# EAGLE board IV_Swinger_2_module (EAGLE 9.1.3)
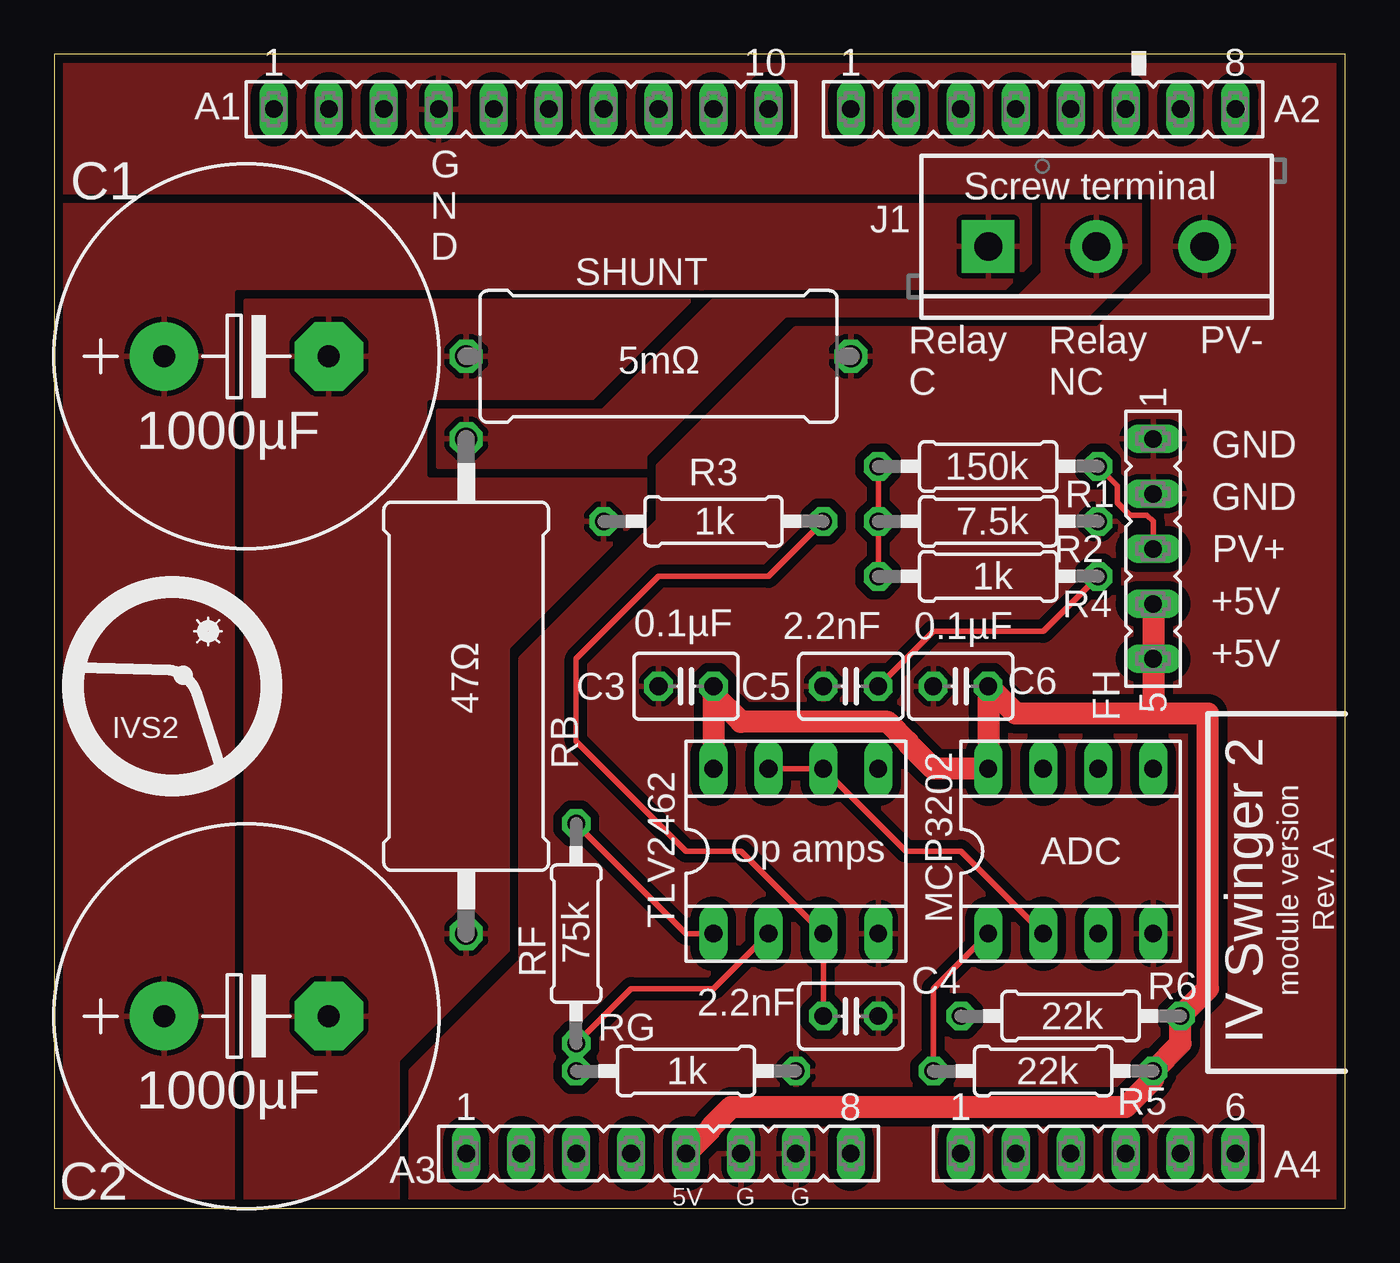
[diagram p0: board, top side]
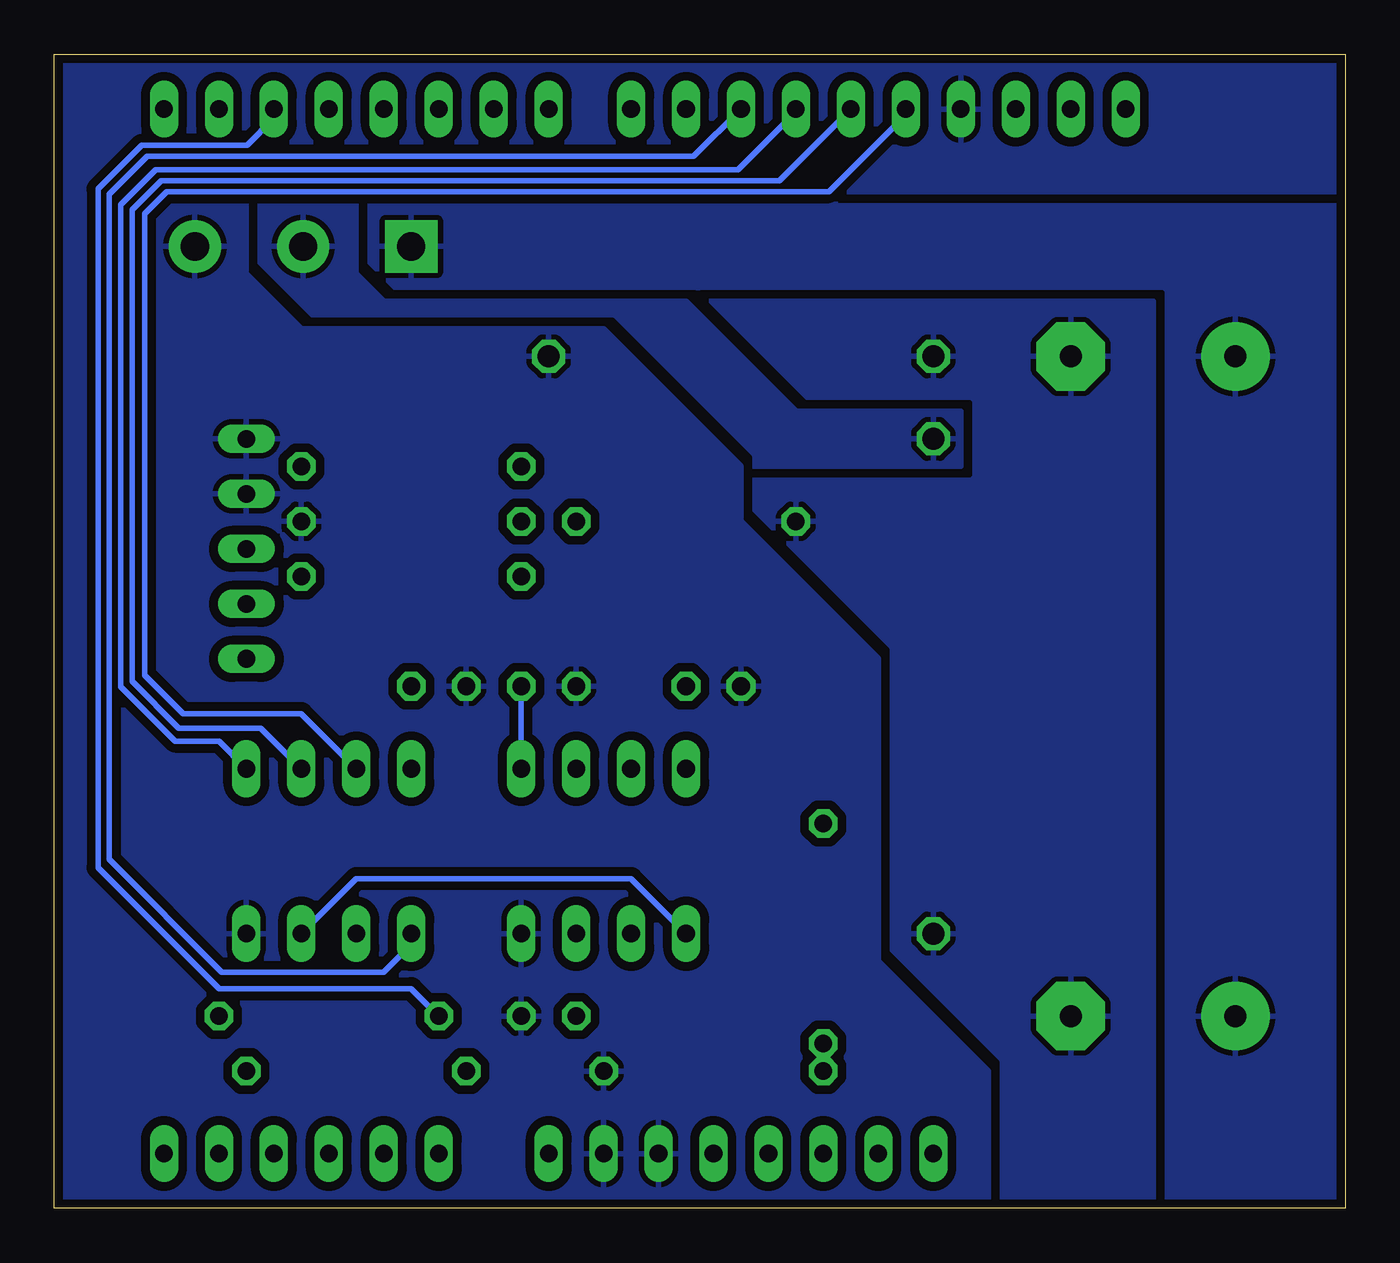
[diagram p1: board, bottom side, seen from below]

Size 59.69 x 53.34 mm. Coordinates in mm from the lower left corner, seen from the top.
Outline: 0,0 59.69,0 59.69,53.34 0,53.34 0,0
Copper layers (1*16): Top 0.035mm / dielectric 1.5mm / Bottom 0.035mm
Design rules "SparkFun-2-layer-STANDARD": minimum track width 10mil, minimum drill 20mil, track to track 10mil, track to pad 8mil, pad to pad 8mil, via to via 10mil, smd to smd 8mil, copper to edge 8mil, drill to drill 8mil, minimum pad ring 10mil, minimum via ring 10mil, stop-mask expansion 4mil, vias tented up to drill 25mil, thermal gap 10mil

## Footprints (pad centres in the part's own frame; a part is rotated, then mirrored left to right if it is on the bottom)
FE10 = drill 0.813 long: 1 -11.43,0; 2 -8.89,0; 3 -6.35,0; 4 -3.81,0; 5 -1.27,0; 6 1.27,0; 7 3.81,0; 8 6.35,0; 9 8.89,0; 10 11.43,0
FE08 = drill 0.813 long: 1 -8.89,0; 2 -6.35,0; 3 -3.81,0; 4 -1.27,0; 5 1.27,0; 6 3.81,0; 7 6.35,0; 8 8.89,0
FE06 = drill 0.813 long: 1 -6.35,0; 2 -3.81,0; 3 -1.27,0; 4 1.27,0; 5 3.81,0; 6 6.35,0
E7,5-18 = drill 1.016 pad 3.15: + -3.81,0 | drill 1.016 pad 3.15 octagon: - 3.81,0
C025-030X050 = drill 0.813 octagon: 1 -1.27,0; 2 1.27,0
FE05-1 = drill 0.813 long: 1 -5.08,0; 2 -2.54,0; 3 0,0; 4 2.54,0; 5 5.08,0
SCREWTERMINAL-5MM-3 = drill 1.3 pad 2.413 square: 1 0,0 | drill 1.3 pad 2.413: 2 5,0; 3 10,0
SOCKET-08 = drill 0.813 long: 1 -3.81,-3.81; 2 -1.27,-3.81; 3 1.27,-3.81; 4 3.81,-3.81; 5 3.81,3.81; 6 1.27,3.81; 7 -1.27,3.81; 8 -3.81,3.81
0207/10 = drill 0.813 octagon: 1 -5.08,0; 2 5.08,0
P0817/22 = drill 1.016 octagon: 1 -11.43,0; 2 11.43,0
0617/17 = drill 1.016 octagon: 1 -8.89,0; 2 8.89,0

## Placement (x,y rotation side)
A1  [FE10]  21.59,50.8 0 top
A2  [FE08]  45.72,50.8 0 top
A3  [FE08]  27.94,2.54 0 top
A4  [FE06]  48.26,2.54 0 top
C1  1000µF  [E7,5-18]  8.89,39.37 0 top
C2  1000µF  [E7,5-18]  8.89,8.89 0 top
C3  0.1µF  [C025-030X050]  29.21,24.13 180 top
C4  2.2nF  [C025-030X050]  36.83,8.89 0 top
C5  2.2nF  [C025-030X050]  36.83,24.13 180 top
C6  0.1µF  [C025-030X050]  41.91,24.13 180 top
FH  [FE05-1]  50.8,30.48 270 top
J1  [SCREWTERMINAL-5MM-3]  43.18,44.45 0 top
MCP3202  ADC  [SOCKET-08]  46.99,16.51 0 top
R1  150k  [0207/10]  43.18,34.29 0 top
R2  7.5k  [0207/10]  43.18,31.75 180 top
R3  1k  [0207/10]  30.48,31.75 180 top
R4  1k  [0207/10]  43.18,29.21 0 top
R5  22k  [0207/10]  45.72,6.35 0 top
R6  22k  [0207/10]  46.99,8.89 0 top
RB  47Ω  [P0817/22]  19.05,24.13 90 top
RF  75k  [0207/10]  24.13,12.7 270 top
RG  1k  [0207/10]  29.21,6.35 180 top
SHUNT  5mΩ  [0617/17]  27.94,39.37 180 top
TLV2462  Op amps  [SOCKET-08]  34.29,16.51 0 top

## Library data of the parts
A1-A4 FH = con-lsta; OC_FARNELL: unknown; OC_NEWARK: unknown
C1-C6 = rcl; SPICEPREFIX: C
J1 = SparkFun-Connectors; PROD_ID: CONN-10134; SF_SKU: PRT-08433
MCP3202 TLV2462 = ic-package
R1-R6 RB RF RG SHUNT = rcl; SPICEPREFIX: R

## Nets
+5V: A3.5 C3.1 C6.1 FH.4 FH.5 MCP3202.8 R5.2 R6.2 TLV2462.8
GND: A1.4 A3.6 A3.7 C3.2 C4.2 C5.2 C6.2 FH.1 FH.2 J1.3 MCP3202.4 R2.1 RG.1 SHUNT.1 TLV2462.4
LOAD_CAP+: C1.+ C2.+ J1.1
LOAD_CAP-: C1.- C2.- R3.2 RB.1 SHUNT.2
N1: FH.3 R1.2
N2: R1.1 R2.2 R4.1
N3: A2.6 R6.1
N4: C5.1 R4.2 TLV2462.5
N5: A1.8 MCP3202.1 R5.1
N6: A1.7 MCP3202.5
N7: A1.6 MCP3202.6
N8: A1.5 MCP3202.7
N9: MCP3202.2 TLV2462.6 TLV2462.7
N10: MCP3202.3 RF.1 TLV2462.1
N11: C4.1 R3.1 TLV2462.3
N12: RF.2 RG.2 TLV2462.2
RELAY_NC: J1.2 RB.2

## Tracks (layer width: path | path; a pad name or v marks a point on that pad's centre or on a via)
+5V
  Top 1.016: A3.5 30.38,3.71 30.38,3.77 31.31,4.7 49.53,4.7 50.8,5.97 R5.2 52.07,7.62 R6.2 53.34,10.16 53.34,22.86 50.8,22.86 | 50.8,22.86 44.45,22.86 C6.1 MCP3202.8 40.64,20.32 39.47,21.49 39.47,21.55 38.54,22.48 31.75,22.48 30.48,23.75 C3.1 TLV2462.8 | FH.4 FH.5 50.8,22.86
GND
  pour Bottom (isolate 0.406): 16.51,0 59.69,0 59.69,53.34 0,53.34 0,46.99 50.8,46.99 50.8,43.18 48.26,40.64 34.29,40.64 27.94,34.29 27.94,31.75 21.59,25.4 21.59,11.43 16.51,6.35
  pour Top (isolate 0.406): 16.51,0 16.51,6.35 21.59,11.43 21.59,25.4 27.94,31.75 27.94,34.29 34.29,40.64 48.26,40.64 50.8,43.18 50.8,46.99 0,46.99 0,53.34 59.69,53.34 59.69,0
LOAD_CAP+
  pour Bottom (isolate 0.406, rank 4): 0,46.99 45.72,46.99 45.72,43.18 44.45,41.91 8.89,41.91 8.89,0 0,0
  pour Top (isolate 0.406, rank 4): 0,0 8.89,0 8.89,41.91 44.45,41.91 45.72,43.18 45.72,46.99 0,46.99
LOAD_CAP-
  pour Top (isolate 0.406, rank 3): 8.89,0 16.51,0 16.51,6.35 21.59,11.43 21.59,25.4 27.94,31.75 27.94,34.29 17.78,34.29 17.78,36.83 25.4,36.83 30.48,41.91 8.89,41.91
  pour Bottom (isolate 0.406, rank 3): 8.89,0 8.89,41.91 30.48,41.91 25.4,36.83 17.78,36.83 17.78,34.29 27.94,34.29 27.94,31.75 21.59,25.4 21.59,11.43 16.51,6.35 16.51,0
N1
  Top 0.254: R1.2 49.15,33.4 49.15,32.61 49.73,32.03 50.52,32.03 50.8,31.75 FH.3
N2
  Top 0.254: R4.1 R2.2 R1.1
N3
  Bottom 0.254: R6.1 43.18,10.16 52.07,10.16 57.66,15.75 57.66,47.12 55.65,49.12 50.77,49.12 49.53,50.37 A2.6
N4
  Top 0.254: R4.2 45.72,26.67 40.64,26.67 C5.1
  Bottom 0.254: TLV2462.5 C5.1
N5
  Top 0.254: R5.1 40.64,10.16 MCP3202.1
  Bottom 0.254: A1.8 30.12,48.62 55.4,48.62 57.15,46.86 57.15,16.13 51.94,10.92 44.45,10.92 43.18,12.19 MCP3202.1
N6
  Bottom 0.254: A1.7 25.4,50.67 28.07,48.01 54.99,48.01 56.62,46.38 56.62,24.11 54.1,21.59 52.07,21.59 MCP3202.5
N7
  Bottom 0.254: MCP3202.6 50.14,22.2 53.92,22.2 56.08,24.36 56.08,46.15 54.74,47.5 26.16,47.5 24.13,49.53 A1.6
N8
  Bottom 0.254: MCP3202.7 48.26,22.86 53.72,22.86 55.5,24.64 55.5,45.97 54.48,46.99 23.88,46.99 20.32,50.55 A1.5
N9
  Top 0.254: TLV2462.7 TLV2462.6 39.37,16.51 41.91,16.51 MCP3202.2
N10
  Top 0.254: RF.1 29.21,12.7 TLV2462.1
  Bottom 0.254: TLV2462.1 33.02,15.24 45.72,15.24 MCP3202.3
N11
  Top 0.254: C4.1 TLV2462.3 31.75,16.51 29.21,16.51 24.13,21.59 24.13,25.4 27.94,29.21 33.02,29.21 R3.1
N12
  Top 0.254: RG.2 RF.2 26.67,10.16 30.48,10.16 TLV2462.2
RELAY_NC
  pour Top (isolate 0.406, rank 2): 50.8,46.99 50.8,43.18 48.26,40.64 39.37,40.64 34.29,40.64 27.94,34.29 17.78,34.29 17.78,36.83 25.4,36.83 30.48,41.91 44.45,41.91 45.72,43.18 45.72,46.99
  pour Bottom (isolate 0.406, rank 2): 45.72,46.99 50.8,46.99 50.8,43.18 48.26,40.64 34.29,40.64 27.94,34.29 17.78,34.29 17.78,36.83 25.4,36.83 30.48,41.91 44.45,41.91 45.72,43.18

## Text on the board
tPlace: . | . | Screw terminal | G / N / D | PV- | Relay / C | Relay / NC | GND | GND | PV+ | +5V | +5V | IVS2 | Rev. A | module version | IV Swinger 2 | 5V | G | G